# EAGLE board Lift (EAGLE 7.6.0)
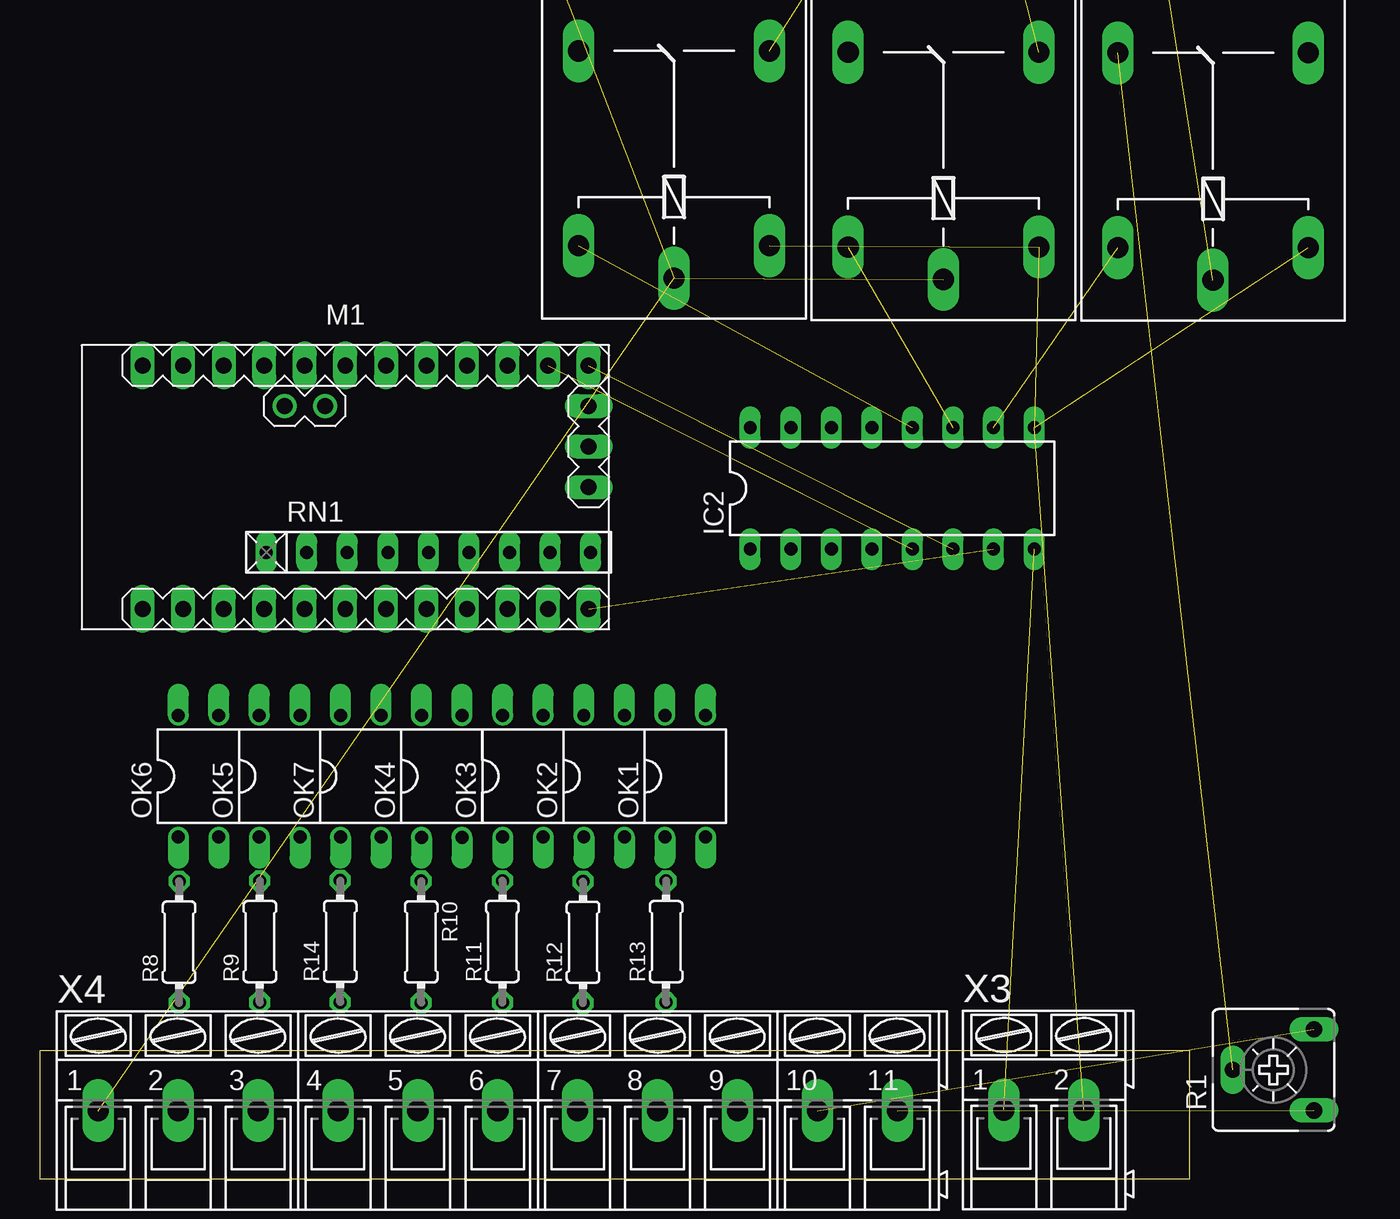
[diagram p0: board, top side]
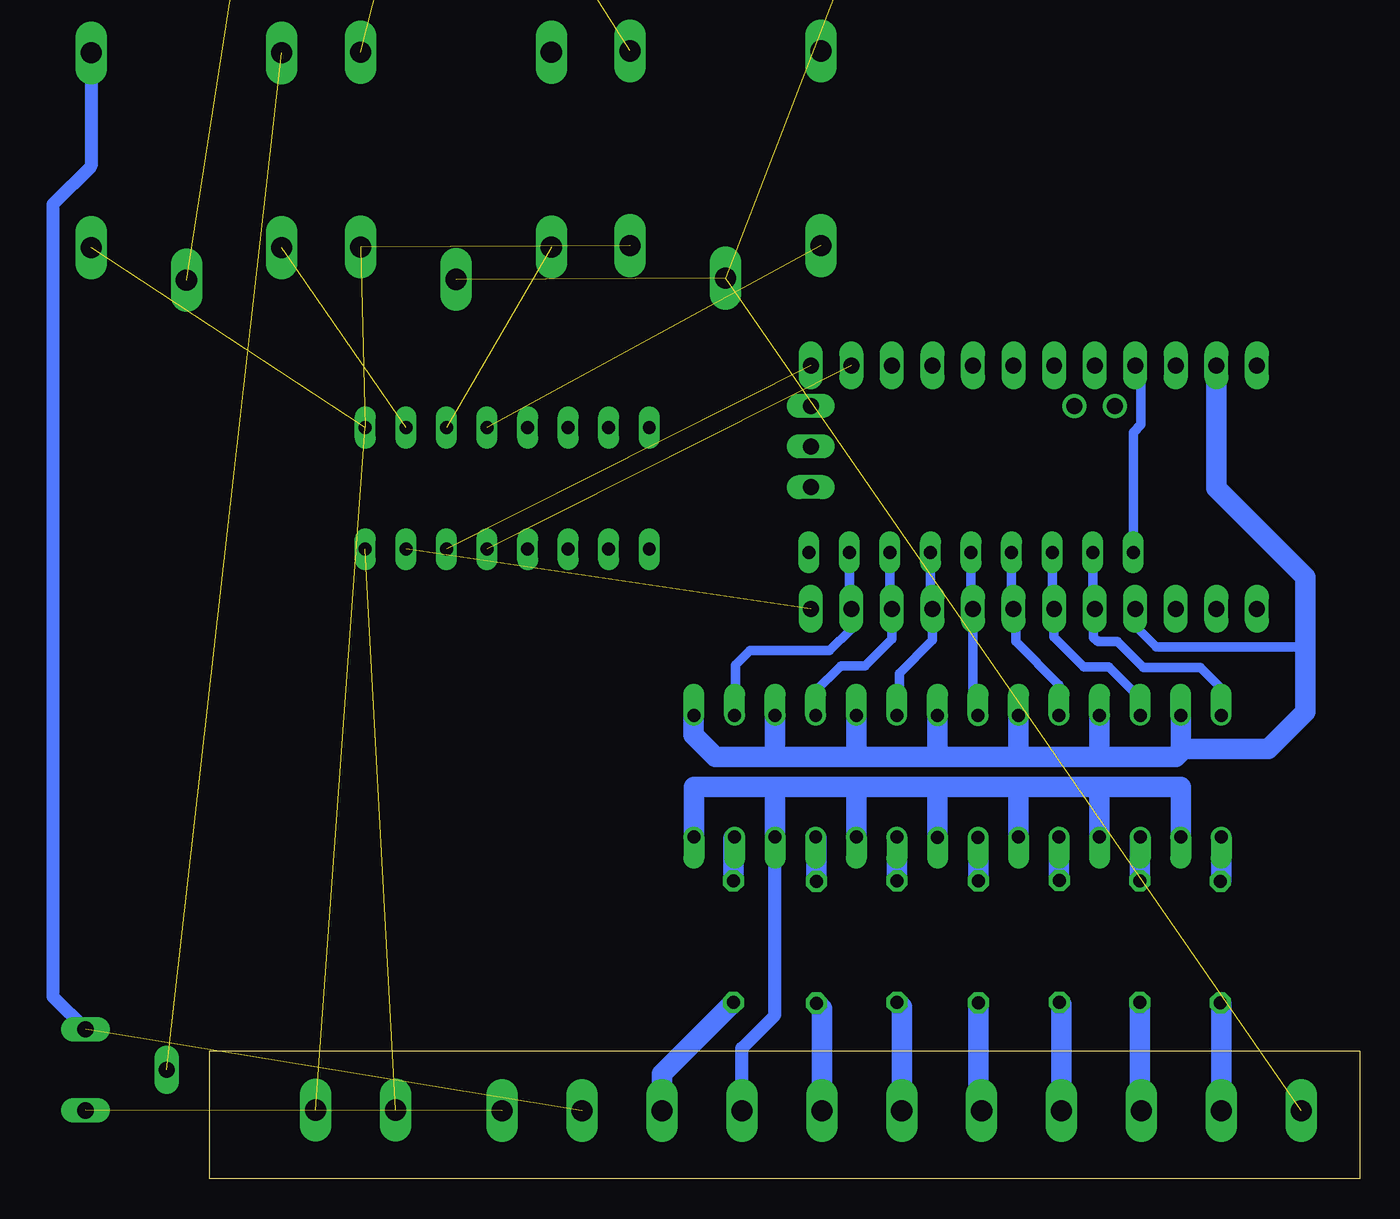
[diagram p1: board, bottom side, seen from below]

Size 72 x 8 mm. Coordinates in mm from the lower left corner, seen from the top.
Copper layers (1*16): Top 0.035mm / dielectric 1.5mm / Bottom 0.035mm
Design rules "default": minimum track width 10mil, minimum drill 24mil, track to track 8mil, track to pad 8mil, pad to pad 8mil, via to via 8mil, smd to smd 8mil, copper to edge 40mil, drill to drill 8mil, minimum pad ring 10mil, minimum via ring 8mil, stop-mask expansion 4mil, vias tented up to drill 0mil, thermal gap 10mil

## Footprints (pad centres in the part's own frame; a part is rotated, then mirrored left to right if it is on the bottom)
DIL16 = drill 0.813 long: 1 -8.89,-3.81; 2 -6.35,-3.81; 3 -3.81,-3.81; 4 -1.27,-3.81; 5 1.27,-3.81; 6 3.81,-3.81; 7 6.35,-3.81; 8 8.89,-3.81; 9 8.89,3.81; 10 6.35,3.81; 11 3.81,3.81; 12 1.27,3.81; 13 -1.27,3.81; 14 -3.81,3.81; 15 -6.35,3.81; 16 -8.89,3.81
G5LE = drill 1.321 long: 1 -7.493,-5.969; 2 -7.493,5.969; O 4.699,5.969; P -9.525,0; S 4.699,-5.969
ARDUINO-PRO-MINI = drill 1: J2.1 -1.27,5.08; J2.2 -3.81,5.08 | drill 1 long: J3.1 15.24,0; J3.2 15.24,2.54; J3.3 15.24,5.08; J6.1 -12.7,7.62; J6.2 -10.16,7.62; J6.3 -7.62,7.62; J6.4 -5.08,7.62; J6.5 -2.54,7.62; J6.6 0,7.62; J6.7 2.54,7.62; J6.8 5.08,7.62; J6.9 7.62,7.62; J6.10 10.16,7.62; J6.11 12.7,7.62; J6.12 15.24,7.62; J7.1 15.24,-7.62; J7.2 12.7,-7.62; J7.3 10.16,-7.62; J7.4 7.62,-7.62; J7.5 5.08,-7.62; J7.6 2.54,-7.62; J7.7 0,-7.62; J7.8 -2.54,-7.62; J7.9 -5.08,-7.62; J7.10 -7.62,-7.62; J7.11 -10.16,-7.62; J7.12 -12.7,-7.62
DIL04 = drill 0.813 offset: 1 -1.27,-3.81; 2 1.27,-3.81; 3 1.27,3.81; 4 -1.27,3.81
CA6V = drill 1.016 long: A -2.54,-2.54; E 2.54,-2.54; S 0,2.54
0204/7 = drill 0.813 octagon: 1 -3.81,0; 2 3.81,0
RN-9 = drill 0.813 long: 1 -10.16,0; 2 -7.62,0; 3 -5.08,0; 4 -2.54,0; 5 0,0; 6 2.54,0; 7 5.08,0; 8 7.62,0; 9 10.16,0
AK300/9 = drill 1.321 long: 1 -20.015,0; 2 -15.011,0; 3 -10.008,0; 4 -5.004,0; 5 0,0; 6 5.004,0; 7 10.008,0; 8 15.011,0; 9 20.015,0
AK300/2 = drill 1.321 long: 1 -2.515,0; 2 2.489,0
AK300/11 = drill 1.321 long: 1 -25.019,0; 2 -20.015,0; 3 -15.011,0; 4 -10.008,0; 5 -5.004,0; 6 0,0; 7 5.004,0; 8 10.008,0; 9 15.011,0; 10 20.015,0; 11 25.019,0

## Placement (x,y rotation side)
IC2  ULN2003AN  [DIL16]  53.36,43.23 0 top  (outside the outline)
K1  G5L  [G5LE]  73.45,65.8 90 top  (outside the outline)
K2  G5L  [G5LE]  56.58,65.84 90 top  (outside the outline)
K3  G5L  [G5LE]  39.7,65.92 90 top  (outside the outline)
M1  ARDUINO-PRO-MINI-5.0V  [ARDUINO-PRO-MINI]  19.12,43.31 0 top  (outside the outline)
OK1  PC817  [DIL04]  40.41,25.21 0 top  (outside the outline)
OK2  PC817  [DIL04]  35.32,25.21 0 top  (outside the outline)
OK3  PC817  [DIL04]  30.24,25.2 0 top  (outside the outline)
OK4  PC817  [DIL04]  25.16,25.2 0 top  (outside the outline)
OK5  PC817  [DIL04]  15.01,25.2 0 top  (outside the outline)
OK6  PC817  [DIL04]  9.93,25.2 0 top  (outside the outline)
OK7  PC817  [DIL04]  20.08,25.2 0 top  (outside the outline)
R1  [CA6V]  77.24,6.82 90 top
R8  [0204/7]  8.71,14.82 90 top  (outside the outline)
R9  [0204/7]  13.77,14.85 90 top  (outside the outline)
R10  [0204/7]  23.87,14.83 270 top  (outside the outline)
R11  [0204/7]  28.96,14.85 90 top  (outside the outline)
R12  [0204/7]  34,14.81 90 top  (outside the outline)
R13  [0204/7]  39.21,14.85 90 top  (outside the outline)
R14  [0204/7]  18.8,14.87 90 top  (outside the outline)
RN1  [RN-9]  24.33,39.22 0 top  (outside the outline)
X1  [AK300/9]  49.12,83.95 180 top  (outside the outline)
X3  [AK300/2]  62.88,4.3 0 top
X4  [AK300/11]  28.67,4.27 0 top

## Library data of the parts
IC2 = uln-udn
K1-K3 = relay; OC_FARNELL: unknown; OC_NEWARK: unknown
M1 = diy-modules
OK1-OK7 = optocoupler; MPN: PC817X4J000F; OC_FARNELL: 9707727; OC_NEWARK: 97K7059
R1 = pot
R8-R14 = rcl
RN1 = resistor-net; OC_FARNELL: unknown; OC_NEWARK: unknown
X1 X3 X4 = con-ptr500; OC_FARNELL: unknown; OC_NEWARK: unknown

## Nets
5V: K1.S R1.E X4.10
12V: IC2.9 K1.1 K2.1 K3.1 X3.2
24V: K2.P K3.P X1.9 X4.1
GND1: R1.A X4.11
GND2: OK1.2 OK2.2 OK3.2 OK4.2 OK5.2 OK6.2 OK7.2 X4.8
GND3: IC2.8 X3.1
N$1: OK2.1 R12.2
N$2: OK1.1 R13.2
N$3: OK3.1 R11.2
N$4: R10.2 X4.5
N$5: OK7.1 R14.2
N$6: R14.1 X4.4
N$7: IC2.10 K1.2
N$8: M1.J7.7 OK5.4 RN1.3
N$9: M1.J7.5 OK4.4 RN1.5
N$10: M1.J7.4 OK3.4 RN1.6
N$11: K1.O R1.S
N$12: M1.J7.6 OK7.4 RN1.4
N$13: M1.J6.4 RN1.1
N$14: K1.P X1.1
N$15: R8.1 X4.2
N$16: R9.1 X4.3
N$17: R11.1 X4.6
N$18: M1.J7.3 OK2.4 RN1.7
N$19: OK5.1 R9.2
N$20: R13.1 X4.9
N$21: M1.J6.2 M1.J7.9 OK1.3 OK2.3 OK3.3 OK4.3 OK5.3 OK6.3 OK7.3
N$22: IC2.12 K3.2
N$23: R12.1 X4.7
N$24: M1.J7.2 OK1.4 RN1.8
N$25: IC2.7 M1.J7.1
N$26: IC2.11 K2.2
N$27: K3.S X1.4
N$28: X1.7 X1.8
N$29: X1.5 X1.6
N$30: K2.S X1.3
N$32: M1.J7.8 OK6.4 RN1.2
N$33: OK6.1 R8.2
N$34: OK4.1 R10.1
N$35: IC2.5 M1.J6.11
N$36: IC2.6 M1.J6.12
RAW: M1.J6.1

## Tracks (layer width: path | path; a pad name or v marks a point on that pad's centre or on a via)
5V  (1 unrouted)
  Bottom 0.813: K1.S 79.42,63.41 81.82,61.02 81.82,11.4 R1.E
12V  (4 unrouted)
24V  (3 unrouted)
GND1  (1 unrouted)
GND2
  Bottom 0.813: X4.8 38.68,8.18 36.62,10.24 36.62,20.68 36.67,20.74 36.67,21.32 OK2.2
  Bottom 1.27: OK1.2 41.68,24.55 36.59,24.55 | 36.59,24.55 31.51,24.55 | 31.51,24.55 26.23,24.55 | 26.23,24.55 21.67,24.55 | 21.67,24.55 16.72,24.55 | 16.72,24.55 11.2,24.55 OK6.2 | OK5.2 16.28,24.11 16.72,24.55 | OK7.2 21.35,24.23 21.67,24.55 | OK4.2 26.43,24.35 26.23,24.55 | OK3.2 31.51,24.55 | OK2.2 36.59,24.55
GND3  (1 unrouted)
N$1
  Bottom 1.27: R12.2 34,21.35 OK2.1
N$2
  Bottom 1.27: R13.2 39.21,21.32 OK1.1
N$3
  Bottom 1.27: OK3.1 R11.2
N$4
  Bottom 1.27: R10.2 23.87,4.48 X4.5
N$5
  Bottom 1.27: OK7.1 18.81,18.69 R14.2
N$6
  Bottom 1.27: X4.4 18.66,10.92 R14.1
N$7  (1 unrouted)
N$8
  Bottom 0.61: OK5.4 13.74,30.07 15.71,32.04 17.25,32.04 19.15,33.94 19.15,35.66 M1.J7.7 19.25,35.81 RN1.3
N$9
  Bottom 0.61: OK4.4 24.2,29.32 M1.J7.5 24.33,35.81 RN1.5
N$10
  Bottom 0.61: OK3.4 28.82,29.16 28.82,31.65 26.74,33.72 M1.J7.4 26.87,35.81 RN1.6
N$11  (1 unrouted)
N$12
  Bottom 0.61: OK7.4 18.81,30.92 21.52,33.63 21.52,35.17 | 21.52,35.17 21.52,35.55 M1.J7.6 | RN1.4 21.79,35.44 21.52,35.17
N$13
  Bottom 0.61: RN1.1 14.17,46.73 13.69,47.21 13.69,50.57 M1.J6.4
N$14  (1 unrouted)
N$15
  Bottom 1.27: X4.2 8.65,10.96 R8.1
N$16
  Bottom 1.27: R9.1 13.77,5.02 13.68,4.93 13.68,4.29 X4.3
N$17
  Bottom 1.27: X4.6 28.67,10.76 R11.1
N$18
  Bottom 0.61: OK2.4 34.09,29.05 34.09,30.5 32.47,32.12 30.96,32.12 29.28,33.8 M1.J7.3 29.41,35.81 RN1.7
N$19
  Bottom 1.27: R9.2 13.77,21.36 OK5.1
N$20
  Bottom 1.27: X4.9 43.68,6.57 R13.1
N$21
  Bottom 0.61: M1.J7.9 14.04,34.62 12.74,33.31 3.59,33.31 3.39,33.51
  Bottom 1.27: OK6.3 11.2,26.71 | 11.2,26.71 11.51,26.4 16.07,26.4 | 16.07,26.4 21.26,26.4 | 21.26,26.4 26.52,26.4 | 26.52,26.4 31.52,26.4 | 31.52,26.4 36.63,26.4 | 36.63,26.4 40.33,26.4 41.72,27.79 41.72,28.97 OK1.3 | OK2.3 36.59,26.44 36.63,26.4 | OK3.3 31.51,26.41 31.52,26.4 | OK4.3 26.43,26.5 26.52,26.4 | OK7.3 21.35,26.5 21.26,26.4 | OK5.3 16.28,26.62 16.07,26.4 | M1.J6.2 8.96,43.24 3.39,37.67 3.39,33.51 3.39,29.24 5.72,26.91 11,26.91 11.2,26.71
N$22  (1 unrouted)
N$23
  Bottom 1.27: X4.7 33.67,10.67 R12.1
N$24
  Bottom 0.61: OK1.4 39.08,29.07 39.08,32.16 38.17,33.07 33.18,33.07 31.82,34.43 M1.J7.2 31.95,35.81 RN1.8
N$25  (1 unrouted)
N$26  (1 unrouted)
N$27  (1 unrouted)
N$28  (1 unrouted)
N$29  (1 unrouted)
N$30  (1 unrouted)
N$32
  Bottom 0.61: OK6.4 8.66,30.7 9.97,32 13.53,32 15.16,33.63 16.38,33.63 16.66,33.9 16.66,35.61 M1.J7.8 16.71,35.81 RN1.2
N$33
  Bottom 1.27: OK6.1 8.66,18.68 R8.2
N$34
  Bottom 1.27: R10.1 23.87,21.37 OK4.1
N$35  (1 unrouted)
N$36  (1 unrouted)